# Altium PCB LED_backup.PcbDoc
Units mm, origin at the board's own origin, x right, y up, seen from the top; angles counter-clockwise.
Board outline 100 x 30 mm, 2 copper layers (Top Layer, Bottom Layer), stack 1.58 mm thick; 42 components, 37 nets, 128 pads, 0 vias.
Unrouted connection lines stored in the file: 2.
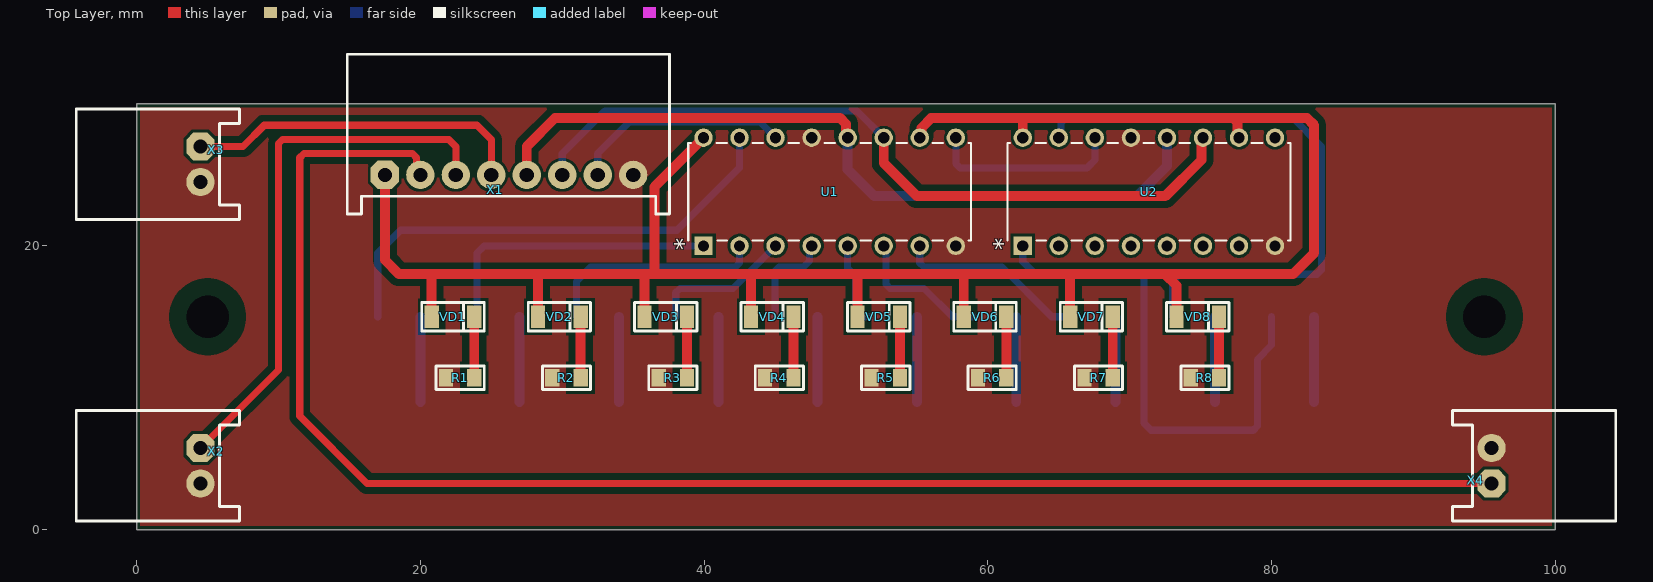
[diagram p0: Top Layer view]
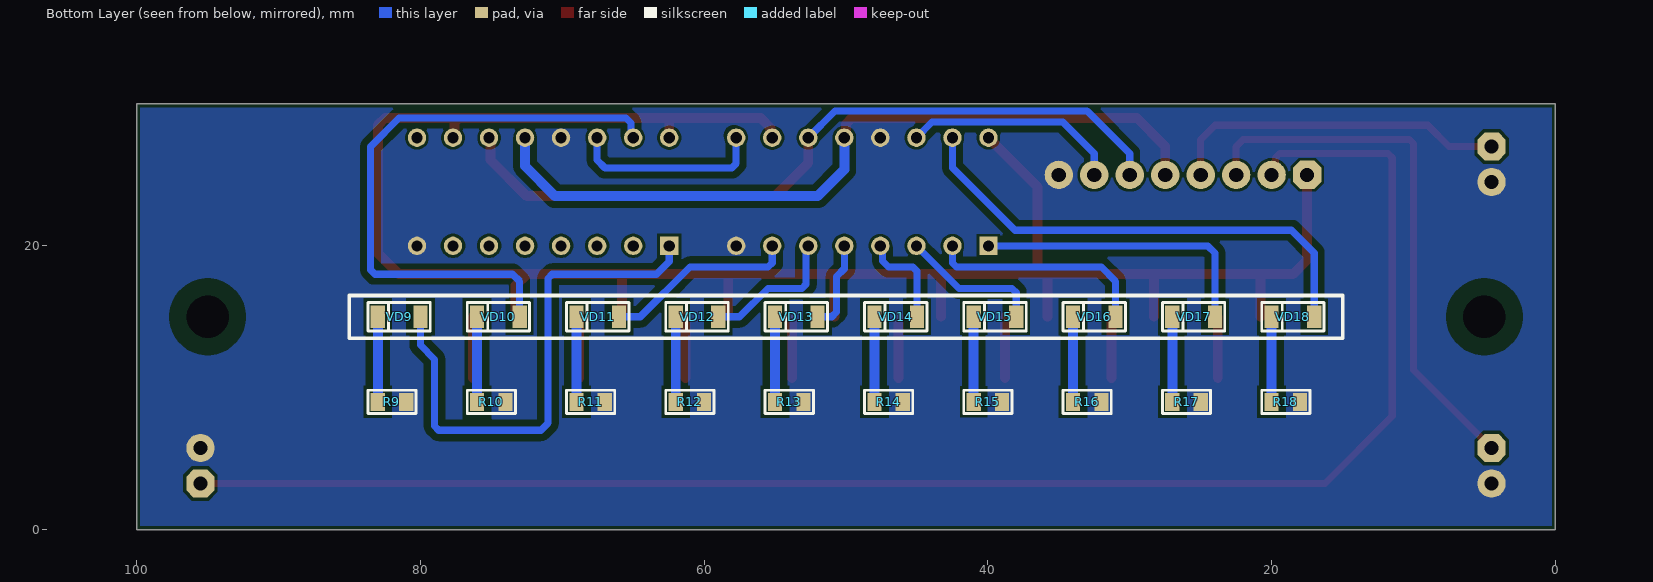
[diagram p1: Bottom Layer view, seen from below]
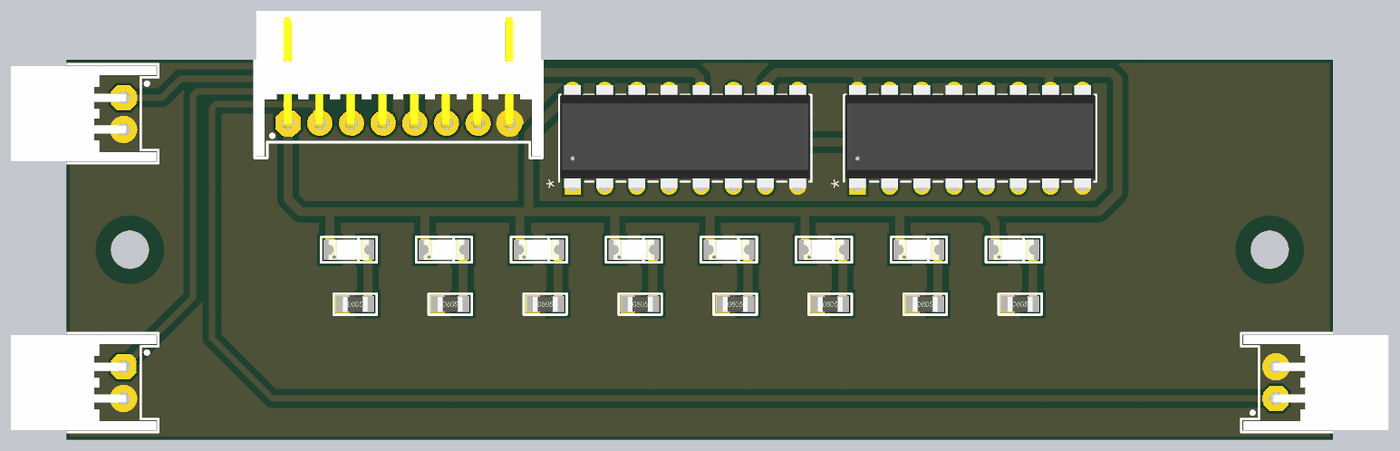
[diagram p2: 3D render of the assembled board from above, using the file's embedded part models]
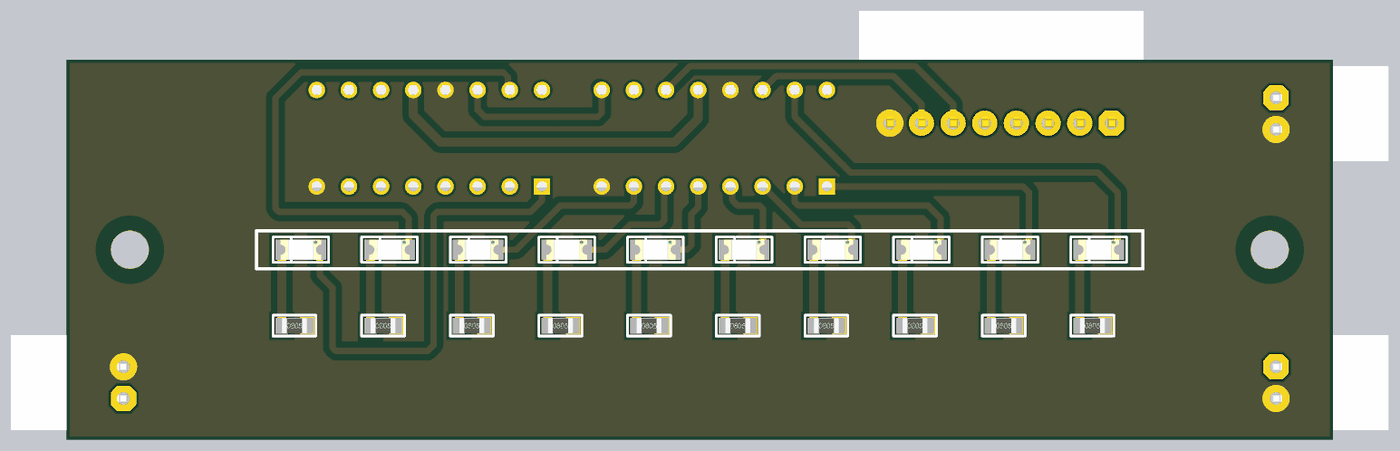
[diagram p3: 3D render of the assembled board from below, using the file's embedded part models]

## Layer stack, top to bottom
Top Solder: solder mask 0.0102, Solder Resist, Dk 3.5
Top Layer: signal copper 0.0356
Dielectric 1: dielectric 1.509, FR-4, Dk 4.8
Bottom Layer: signal copper 0.0356
Bottom Solder: solder mask 0.0102, Solder Resist, Dk 3.5

## Board outline
0,0 100,0 100,30 0,30

## Design rules (kind name [scope] priority, off if disabled: settings)
BoardOutlineClearance [All] p1: gap=0.25 ignorepadtopadclearanceinfootprint=FALSE
Clearance Clearance_2 [(ObjectKind = 'Pad') And (PadViaLibraryTemplate = 'c152h300')] p1: gap=1.2 ignorepadtopadclearanceinfootprint=FALSE except(0: Arc-Hole Track-Hole SMDPad-Hole THPad-Hole Via-Hole Fill-Hole Poly-Hole Region-Hole Text-Hole)
Clearance Clearance_MultiLayerPad [OnLayer('Multi-Layer') and IsPad] p2: gap=0.2 ignorepadtopadclearanceinfootprint=FALSE except(0: Arc-Hole Track-Hole SMDPad-Hole THPad-Hole Via-Hole Fill-Hole Poly-Hole Region-Hole Text-Hole)
Clearance Clearance_Polygon [InPolygon] p3: gap=0.5 ignorepadtopadclearanceinfootprint=FALSE except(0: Arc-Hole Track-Hole SMDPad-Hole THPad-Hole Via-Hole Fill-Hole Poly-Hole Region-Hole Text-Hole)
Clearance [All] p4: gap=0.1 ignorepadtopadclearanceinfootprint=FALSE except(0: Arc-Hole Track-Hole SMDPad-Hole THPad-Hole Via-Hole Fill-Hole Poly-Hole Region-Hole Text-Hole)
ComponentClearance [All] p1: gap=0.2 collisioncheckmode=3 verticalgap=0.2 showdistances=FALSE
DiffPairsRouting [All] p1: maxlimit=0.5 minlimit=0.1 mostfreqgap=0.15 toplayer_minwidth=0.1 toplayer_maxwidth=0.5 toplayer_prefwidth=0.15 bottomlayer_minwidth=0.1 bottomlayer_maxwidth=0.5 bottomlayer_prefwidth=0.15 maxuncoupledlength=12.7
Height [All] p1: minheight=0 maxheight=50 prefheight=12.7
HoleSize [All] p1: absolutevalues=TRUE maxlimit=10 minlimit=0.3 maxpercent=80.000 minpercent=20.000
HoleToHoleClearance [All] p1: gap=0.3 allowstackedmicrovias=TRUE
MinimumSolderMaskSliver [All] p1: minsoldermaskwidth=0.05
PlaneClearance [All] p1: clearance=0.5
PlaneConnect [All] p1: planeconnectstyle=Relief reliefexpansion=0.5 reliefentries=4 reliefconductorwidth=0.2 reliefairgap=0.2
PolygonConnect PolygonConnect_PadGND [InNet('GND') and IsPad] p1: connectstyle=Direct reliefconductorwidth=0.2 reliefentries=4 polygonreliefangle="90 Angle" airgapwidth=0.2
PolygonConnect PolygonConnect_Via [IsVia] p2: connectstyle=Direct reliefconductorwidth=0.254 reliefentries=4 polygonreliefangle="90 Angle" airgapwidth=0.254
PolygonConnect [All] p3: connectstyle=Direct reliefconductorwidth=0.2 reliefentries=4 polygonreliefangle="90 Angle" airgapwidth=0.2
RoutingVias [All] p1: holewidth=0.2 width=0.4 viastyle="Through Hole" minholewidth=0.2 minwidth=0.4 maxholewidth=0.5 maxwidth=1.2
SilkToSolderMaskClearance [IsPad] p1: minsilkscreentomaskgap=0.05 clearancetoexposedcopper=TRUE
SolderMaskExpansion [All] p1: expansion=0.075 istentingtop=FALSE
Width [All] p1: maxlimit=10 minlimit=0.1 preferedwidth=0.1
21 further rules are at their usual default settings.

## Components (designator, comment, footprint, x,y, rotation, side; value= is the part's Value field where it differs from the comment)
R1 "Resistor film, 100R, ±5%, 0201, 0.05W, -55...+125°C" "RES: 0805" 22.8,10.7 r0 top value=100R
R2 "Resistor film, 100R, ±5%, 0201, 0.05W, -55...+125°C" "RES: 0805" 30.3,10.7 r0 top value=100R
R3 "Resistor film, 100R, ±5%, 0201, 0.05W, -55...+125°C" "RES: 0805" 37.8,10.7 r0 top value=100R
R4 "Resistor film, 100R, ±5%, 0201, 0.05W, -55...+125°C" "RES: 0805" 45.3,10.7 r0 top value=100R
R5 "Resistor film, 100R, ±5%, 0201, 0.05W, -55...+125°C" "RES: 0805" 52.8,10.7 r0 top value=100R
R6 "Resistor film, 100R, ±5%, 0201, 0.05W, -55...+125°C" "RES: 0805" 60.3,10.7 r0 top value=100R
R7 "Resistor film, 100R, ±5%, 0201, 0.05W, -55...+125°C" "RES: 0805" 67.8,10.7 r0 top value=100R
R8 "Resistor film, 100R, ±5%, 0201, 0.05W, -55...+125°C" "RES: 0805" 75.3,10.7 r0 top value=100R
R9 "Resistor film, 220R, ±5%, 0201, 0.05W, -55...+125°C" "RES: 0805" 82,9 r180 bottom value=220R
R10 "Resistor film, 220R, ±5%, 0201, 0.05W, -55...+125°C" "RES: 0805" 75,9 r180 bottom value=220R
R11 "Resistor film, 220R, ±5%, 0201, 0.05W, -55...+125°C" "RES: 0805" 68,9 r180 bottom value=220R
R12 "Resistor film, 220R, ±5%, 0201, 0.05W, -55...+125°C" "RES: 0805" 61,9 r180 bottom value=220R
R13 "Resistor film, 220R, ±5%, 0201, 0.05W, -55...+125°C" "RES: 0805" 54,9 r180 bottom value=220R
R14 "Resistor film, 220R, ±5%, 0201, 0.05W, -55...+125°C" "RES: 0805" 47,9 r180 bottom value=220R
R15 "Resistor film, 220R, ±5%, 0201, 0.05W, -55...+125°C" "RES: 0805" 40,9 r180 bottom value=220R
R16 "Resistor film, 220R, ±5%, 0201, 0.05W, -55...+125°C" "RES: 0805" 33,9 r180 bottom value=220R
R17 "Resistor film, 220R, ±5%, 0201, 0.05W, -55...+125°C" "RES: 0805" 26,9 r180 bottom value=220R
R18 "Resistor film, 220R, ±5%, 0201, 0.05W, -55...+125°C" "RES: 0805" 19,9 r180 bottom value=220R
U1 "SN74HC595N" N16 39.96,20 r90 top
U2 "SN74HC595N" N16 62.46,20 r90 top
VD1 "LED, Green, *, *, *, -55...+150°C" "LED: 1206R" 22.3,15 r0 top
VD2 "LED, Green, *, *, *, -55...+150°C" "LED: 1206R" 29.8,15 r0 top
VD3 "LED, Green, *, *, *, -55...+150°C" "LED: 1206R" 37.3,15 r0 top
VD4 "LED, Green, *, *, *, -55...+150°C" "LED: 1206R" 44.8,15 r0 top
VD5 "LED, Green, *, *, *, -55...+150°C" "LED: 1206R" 52.3,15 r0 top
VD6 "LED, Green, *, *, *, -55...+150°C" "LED: 1206R" 59.8,15 r0 top
VD7 "LED, Green, *, *, *, -55...+150°C" "LED: 1206R" 67.3,15 r0 top
VD8 "LED, Green, *, *, *, -55...+150°C" "LED: 1206R" 74.8,15 r0 top
VD9 "LED, Green, *, *, *, -55...+150°C" "LED: 1206B" 81.5,15 r0 bottom
VD10 "LED, Green, *, *, *, -55...+150°C" "LED: 1206B" 74.5,15 r0 bottom
VD11 "LED, Green, *, *, *, -55...+150°C" "LED: 1206B" 67.5,15 r0 bottom
VD12 "LED, Green, *, *, *, -55...+150°C" "LED: 1206B" 60.5,15 r0 bottom
VD13 "LED, Green, *, *, *, -55...+150°C" "LED: 1206B" 53.5,15 r0 bottom
VD14 "LED, Green, *, *, *, -55...+150°C" "LED: 1206B" 46.5,15 r0 bottom
VD15 "LED, Green, *, *, *, -55...+150°C" "LED: 1206B" 39.5,15 r0 bottom
VD16 "LED, Green, *, *, *, -55...+150°C" "LED: 1206B" 32.5,15 r0 bottom
VD17 "LED, Green, *, *, *, -55...+150°C" "LED: 1206B" 25.5,15 r0 bottom
VD18 "LED, Green, *, *, *, -55...+150°C" "LED: 1206B" 18.5,15 r0 bottom
X1 "Connector, 8pin, 2.5mm, 250VAC, 3A" "CON: CWF-8R" 26.25,25 r0 top
X2 "Connector, 2pin, 2.54mm, 250VAC, 3A" "CON: CWF-2R" 4.5,4.5 r270 top
X3 "Connector, 2pin, 2.54mm, 250VAC, 3A" "CON: CWF-2R" 4.5,25.75 r270 top
X4 "Connector, 2pin, 2.54mm, 250VAC, 3A" "CON: CWF-2R" 95.5,4.5 r90 top

## Footprints (in the part's own frame and the unit in brackets; to place one, negate y for a bottom-side part, rotate by r counter-clockwise, add the part's x,y. Pads: shape width x height; smd on the part's side, far side on the other; paste and mask are expansions set on the pad)
"CON: CWF-2R" [mm]
  oct 2x2 hole 1: 1(-1.25,0)
  round 2 hole 1: 2(1.25,0)
  round 0.5 on Mech1: ""(-3.3,2.2)
  round 0.5 on Top Overlay: ""(-2.375,1.85)
  silkscreen extent -3.9,-8.75 3.9,2.75, body extent -3.75,-8.9 3.75,2.6, height 5.85
"CON: CWF-8R" [mm]
  oct 2x2 hole 1: 1(-8.75,0)
  round 2 hole 1: 2(-6.25,0) 3(-3.75,0) 4(-1.25,0) 5(1.25,0) 6(3.75,0) 7(6.25,0) 8(8.75,0)
  round 0.5 on Mech1: ""(-10.7,-2.1)
  round 0.5 on Top Overlay: ""(-10,-1)
  silkscreen extent -11.4,-2.75 11.31,8.5, body extent -11.3,-2.62 11.2,8.88, height 5.85
"LED: 1206B" [mm]
  rect 1x1.6 smd: 1(-1.5,0) 2(1.5,0)
  silkscreen extent -2.2,-1 2.2,1, body extent -1.6,-0.8 1.6,0.8, height 1.1
"LED: 1206R" [mm]
  rect 1x1.6 smd: 1(-1.5,0) 2(1.5,0)
  silkscreen extent -2.2,-1 2.2,1, body extent -1.6,-0.8 1.6,0.8, height 1.1
N16 [mil]
  rect 51x51 hole 31 mask+0: 1(0,0)
  round 51 hole 31 mask+0: 2(0,-100) 3(0,-200) 4(0,-300) 5(0,-400) 6(0,-500) 7(0,-600) 8(0,-700) 9(300,-700) 10(300,-600) 11(300,-500) 12(300,-400) 13(300,-300) 14(300,-200) 15(300,-100) 16(300,0)
  silkscreen extent 15,-742 285,43, body extent -5,-737 315,37, height 205
"RES: 0805" [mm]
  rect 1x1.25 smd: 1(-1,0) 2(1,0)
  silkscreen extent -1.7,-0.82 1.7,0.82, body extent -1,-0.6 1,0.6, height 0.48

## Part data
R1 R2 R3 R4 R5 R6 R7 R8 R9 R10 R11 R12 R13 R14 R15 R16 R17 R18: library part Resistor, Manufacturer=Yageo, Package=0201, PartNumber=RC0201JR-07100RL, Power=0.05W, Temperature=-55...+125°C, Tolerance=±5%, TypeResistor="Resistor film", HelpURL=https://www.digikey.com/product-detail/en/yageo/RC0201JR-07100RL/311-100NCT-ND/1949006
  R1 R2 R3 R4 R5 R6 R7 R8: ValueManufacturerPartNumber="Resistor film, 100R, ±5%, 0201, 0.05W, -55...+125°C"
  R9 R10 R11 R12 R13 R14 R15 R16 R17 R18: ValueManufacturerPartNumber="Resistor film, 220R, ±5%, 0201, 0.05W, -55...+125°C"
U1 U2: "8-Bit Shift Registers With 3-State Output Registers", Manufacturer="Texas Instruments", PACKAGE_DESIGNATOR=N, Copyright="Copyright (C) 2021 Accelerated Designs. All rights reserved", Datasheet_URL=http://www.ti.com/lit/gpn/SN74HC595, FAMILY_NAME="SHIFT REGISTER", GENERIC_PART_NUMBER=SN74HC595, INDUSTRY_STD_PKG_TYPE=PDIP, PIN_COUNT=16, RefDes=RefDes, Type=DEV
VD1 VD2 VD3 VD4 VD5 VD6 VD7 VD8 VD9 VD10 VD11 VD12 VD13 VD14 VD15 VD16 VD17 VD18: library part LED_single, Color=GREEN, ColorParameter=Green, Temperature=-55...+150°C, TypeDiode=LED, ValueManufacturerPartNumber="LED, Green, *, *, *, -55...+150°C"
X1: library part CWF-8, CurrentMax=3A, Manufacturer=Connfly, VoltageMax=250VAC, CommentText="\"Разъем\"", HelpURL=https://www.chipdip.ru/product/cwf-8, Multichannel=8pin, PartNumber=CWF-8, Pitch=2.5mm, TypeConnector=Connector, ValueManufacturerPartNumber="Connector, 8pin, 2.5mm, 250VAC, 3A"
X2 X3 X4: library part CWF-2, CurrentMax=3A, Manufacturer=Connfly, PartNumber=CWF-2R, VoltageMax=250VAC, CommentText="\"Разъем\"", HelpURL=https://www.chipdip.ru/product/cwf-2r-ds1069-2-mr, Multichannel=2pin, Pitch=2.54mm, TypeConnector=Connector, ValueManufacturerPartNumber="Connector, 2pin, 2.54mm, 250VAC, 3A"

## Free pads (board coordinates)
  round 1.524 hole 3: 1(5,15) 1(95,15)

## Nets (pads, with @x,y where several pads share a name; then routed paths per layer and width w, separated by ;. In a path a pad name is that pad's centre, name@x,y a point inside that pad or via, vN(x,y) a via of type N, cw(c..) or ccw(c..) an arc to the next point about the centre after c; other vN are vias at no path point)
B1: X1.3 X2.1 | length 38.6
  Top Layer w0.5: X2.1 10,11.25 10,27.207 10.293,27.5 22,27.5 22.5,27 X1.3
B2: X1.4 X3.1 | length 24
  Top Layer w0.5: X3.1 7.5,27 9,28.5 24,28.5 25,27.5 X1.4
BREV: X1.2 X4.1 | length 114
  Top Layer w0.5: X1.2 19.732,25.268 19.732,26.207 19.439,26.5 11.793,26.5 11.5,26.207 11.5,8 16.25,3.25 91.75,3.25 X4.1
GND: R1.1 R2.1 R3.1 R4.1 R5.1 R6.1 R7.1 R8.1 R9.2 R10.2 R11.2 R12.2 R13.2 R14.2 R15.2 R16.2 R17.2 R18.2 U1.8 U1.13 U2.8 U2.13 X1.8 X2.2 X3.2 X4.2
NetR1_2: R1.2 VD1.2 | length 4.3
  Top Layer w0.7: R1.2 VD1.2
NetR2_2: R2.2 VD2.2 | length 4.3
  Top Layer w0.7: R2.2 VD2.2
NetR3_2: R3.2 VD3.2 | length 4.3
  Top Layer w0.7: R3.2 VD3.2
NetR4_2: R4.2 VD4.2 | length 4.3
  Top Layer w0.7: R4.2 VD4.2
NetR5_2: R5.2 VD5.2 | length 4.3
  Top Layer w0.7: R5.2 VD5.2
NetR6_2: R6.2 VD6.2 | length 4.3
  Top Layer w0.7: R6.2 VD6.2
NetR7_2: R7.2 VD7.2 | length 4.3
  Top Layer w0.7: R7.2 VD7.2
NetR8_2: R8.2 VD8.2 | length 4.3
  Top Layer w0.7: R8.2 VD8.2
NetR9_1: R9.1 VD9.2 | length 6
  Bottom Layer w0.7: R9.1 VD9.2
NetR10_1: R10.1 VD10.2 | length 6
  Bottom Layer w0.7: R10.1 VD10.2
NetR11_1: R11.1 VD11.2 | length 6
  Bottom Layer w0.7: R11.1 VD11.2
NetR12_1: R12.1 VD12.2 | length 6
  Bottom Layer w0.7: R12.1 VD12.2
NetR13_1: R13.1 VD13.2 | length 6
  Bottom Layer w0.7: R13.1 VD13.2
NetR14_1: R14.1 VD14.2 | length 6
  Bottom Layer w0.7: R14.1 VD14.2
NetR15_1: R15.1 VD15.2 | length 6
  Bottom Layer w0.7: R15.1 VD15.2
NetR16_1: R16.1 VD16.2 | length 6
  Bottom Layer w0.7: R16.1 VD16.2
NetR17_1: R17.1 VD17.2 | length 6
  Bottom Layer w0.7: R17.1 VD17.2
NetR18_1: R18.1 VD18.2 | length 6
  Bottom Layer w0.7: R18.1 VD18.2
NetU1_1: U1.1 VD17.1 | length 20.7
  Bottom Layer w0.5: VD17.1 24,19.5 24.5,20 U1.1
NetU1_2: U1.2 VD16.1 | length 15.7
  Bottom Layer w0.5: VD16.1 31,17.5 32,18.5 42.207,18.5 42.5,18.793 U1.2
NetU1_3: U1.3 VD15.1 | length 10.1
  Bottom Layer w0.5: VD15.1 38,16.707 38.293,17 42.04,17 U1.3@45.032,19.992
NetU1_4: U1.4 VD14.1 | length 7.1
  Bottom Layer w0.5: VD14.1 45,18.207 45.293,18.5 47,18.5 47.428,18.928 47.428,19.848 U1.4
NetU1_5: U1.5 VD13.1 | length 6.4
  Bottom Layer w0.5: U1.5 50.12,18.38 50.658,17.842 50.658,15.342 51,15 VD13.1
NetU1_6: U1.6 VD12.1 | length 9.9
  Bottom Layer w0.5: U1.6 52.812,19.848 52.812,17.293 53.105,17 55.5,17 57.5,15 VD12.1
NetU1_7: U1.7 VD11.1 | length 13.6
  Bottom Layer w0.5: U1.7 55.2,18.793 55.493,18.5 61,18.5 64.5,15 VD11.1
NetU1_9: U1.9 U2.14 | length 13.8
  Bottom Layer w0.5: U1.9@57.892,27.772 U1.9 57.74,25.793 58.033,25.5 67,25.5 67.54,26.04 U2.14
NetU1_10: U1.10 U1.16 U2.10 U2.16 VD1.1 VD2.1 VD3.1 VD4.1 VD5.1 VD6.1 VD7.1 VD8.1 X1.1 | length 147.7
  Top Layer w0.7: X1.1 17.5,19 18.5,18 20.8,18 ; VD1.1 20.8,18 ; VD2.1 28.3,17.59 ; VD3.1 35.8,18 ; U1.16@40,27.66 U1.16 36.5,24.16 36.5,18 ; VD4.1 43.3,18 ; VD5.1 50.8,17.7 ; U1.10 55.314,27.734 55.314,28.308 56.006,29 62.5,29 ; VD6.1 58.3,18 ; U2.16 62.46,28.96 62.5,29 ; VD7.1 65.8,17.59 ; VD8.1 73.3,17.2 72.5,18 ; U2.10 77.586,27.734 77.586,28.704 77.29,29 ; 20.8,18 35.8,18 ; 35.8,18 36.5,18 ; 36.5,18 43.3,18 ; 43.3,18 58.3,18 ; 58.3,18 72.5,18 ; 62.5,29 77.29,29 ; 72.5,18 81.5,18 83,19.5 83,28.5 82.5,29 77.29,29
NetU1_15: U1.15 VD18.1 | length 34.6
  Bottom Layer w0.5: VD18.1 17,19.5 18.598,21.098 38.098,21.098 42.5,25.5 U1.15
NetU2_1: U2.1 VD9.1 | length 36.8
  Bottom Layer w0.5: U2.1 62.46,18.893 63.353,18 70.707,18 71,17.707 71,7.5 71.5,7 78.707,7 79,7.293 79,12 80,13 VD9.1
NetU2_15: U2.15 VD10.1 | length 42.5
  Bottom Layer w0.5: U2.15 65.152,27.772 65.152,28.652 65.5,29 81.5,29 83.5,27 83.5,18.293 83.207,18 73.5,18 73,17.5 VD10.1
RCLK: U1.12 U2.12 X1.5 | length 54.9
  Top Layer w0.7: X1.5 27.5,27 29.5,29 49.596,29 50.006,28.59 50.006,27.734 U1.12
  Bottom Layer w0.7: U1.12 50.12,25.38 52,23.5 70.5,23.5 72.62,25.62 U2.12
SER: U1.14 X1.7 | length 15.4
  Bottom Layer w0.5: X1.7 32.5,26.5 34.718,28.718 43.942,28.718 U1.14
SRCLK: U1.11 U2.11 X1.6 | length 54
  Top Layer w0.7: U1.11 52.66,25.84 55,23.5 72.5,23.5 75.046,26.046 75.046,27.506 U2.11
  Bottom Layer w0.5: X1.6 30,26.5 33,29.5 50.78,29.5 U1.11
pads on no net: U2.2 U2.3 U2.4 U2.5 U2.6 U2.7 U2.9 X1. X2. X3. X4.

## Polygon pours and split planes (outlines as drawn)
GND on Top Layer "GND_L01_P000" (solid, remove dead copper, pour order 0): 0,30 100,30 100,0 0,0
GND on Bottom Layer "GND_L02_P001" (solid, remove dead copper, pour order 1): 0,30 100,30 100,0 0,0

## Silkscreen, mask and mechanical layers (free items; w line width, h text height)
Bottom Overlay:
  lines w0.254: 15,13.5 85,13.5 85,15 85,16.5 15,16.5 15,15 15,13.5
Border:
  the board outline again, w0.2

## Dimensions
0,0 to 0,30 on Size
0,30 to 100,30 on Size

## Text inside footprints (layer, text, board x,y; h text height)
U1: 3D view "*" at 40.595,20.445 h1.27 r90; Top Overlay "*" at 39.185,19.683 h1.27 r90
U2: 3D view "*" at 63.095,20.445 h1.27 r90; Top Overlay "*" at 61.685,19.683 h1.27 r90